# Altium PCB TX.PcbDoc
Units mm, origin at the board's own origin, x right, y up, seen from the top; angles counter-clockwise.
Board outline 28 x 47 mm, 2 copper layers (Top Layer, Bottom Layer); 23 components, 16 nets, 63 pads, 3 vias.
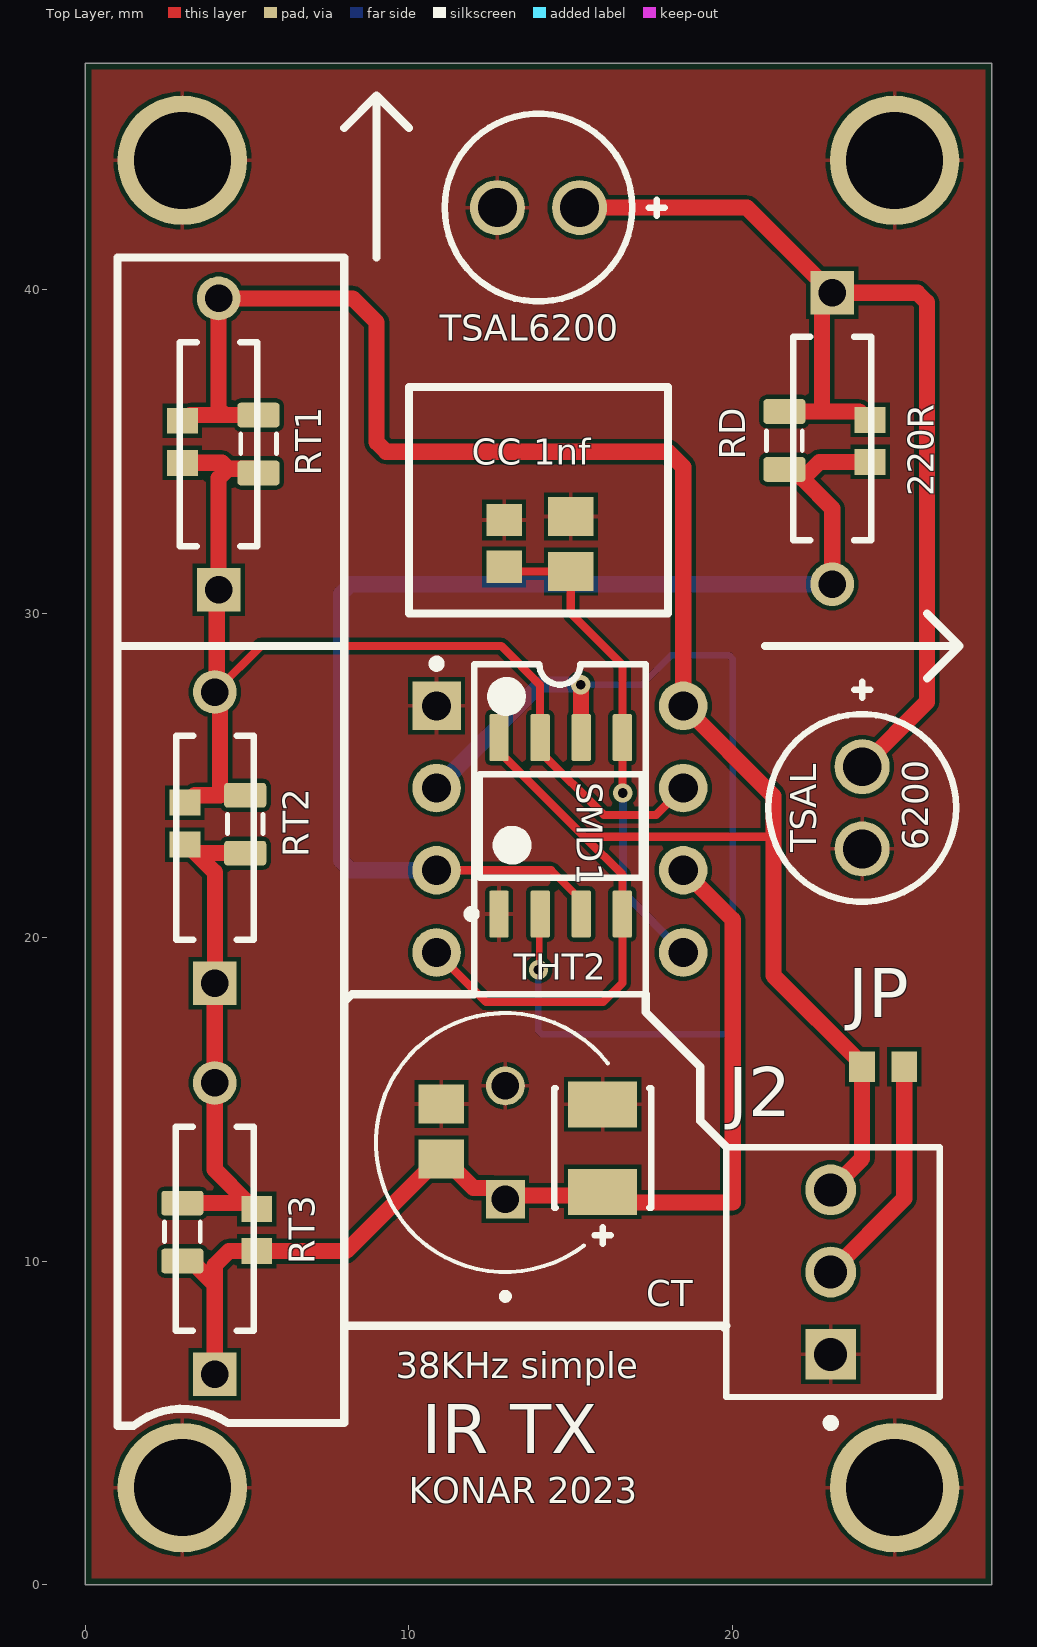
[diagram p0: Top Layer view]
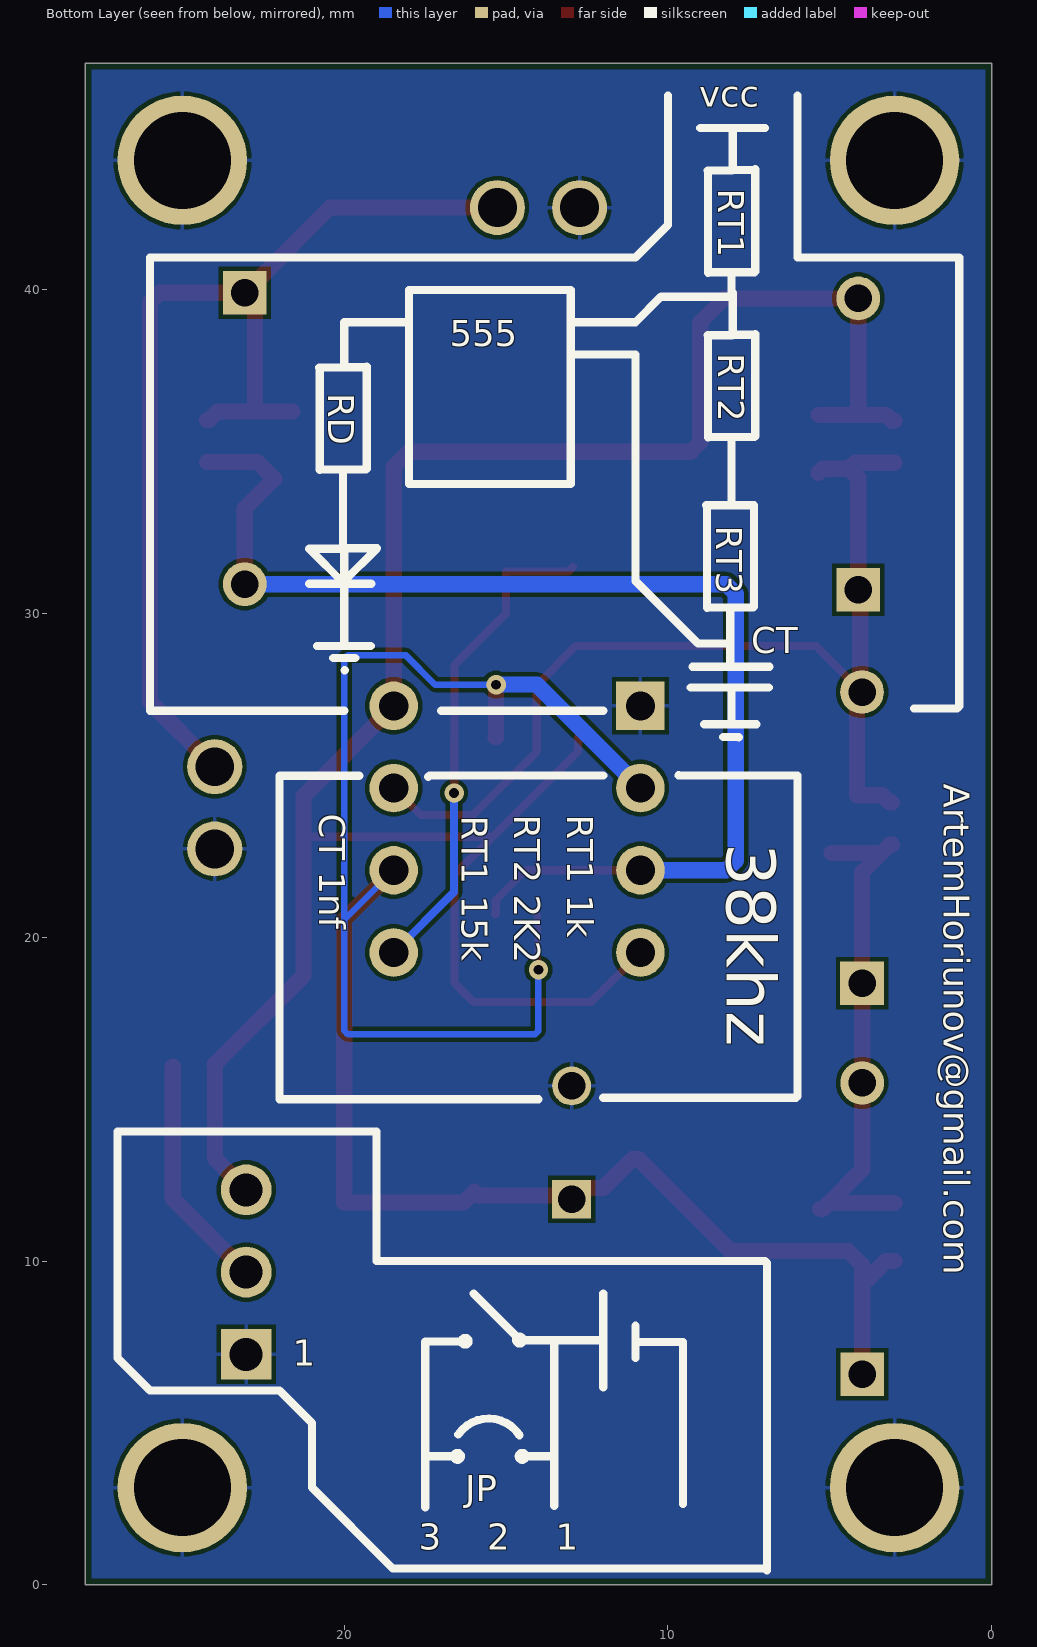
[diagram p1: Bottom Layer view, seen from below]
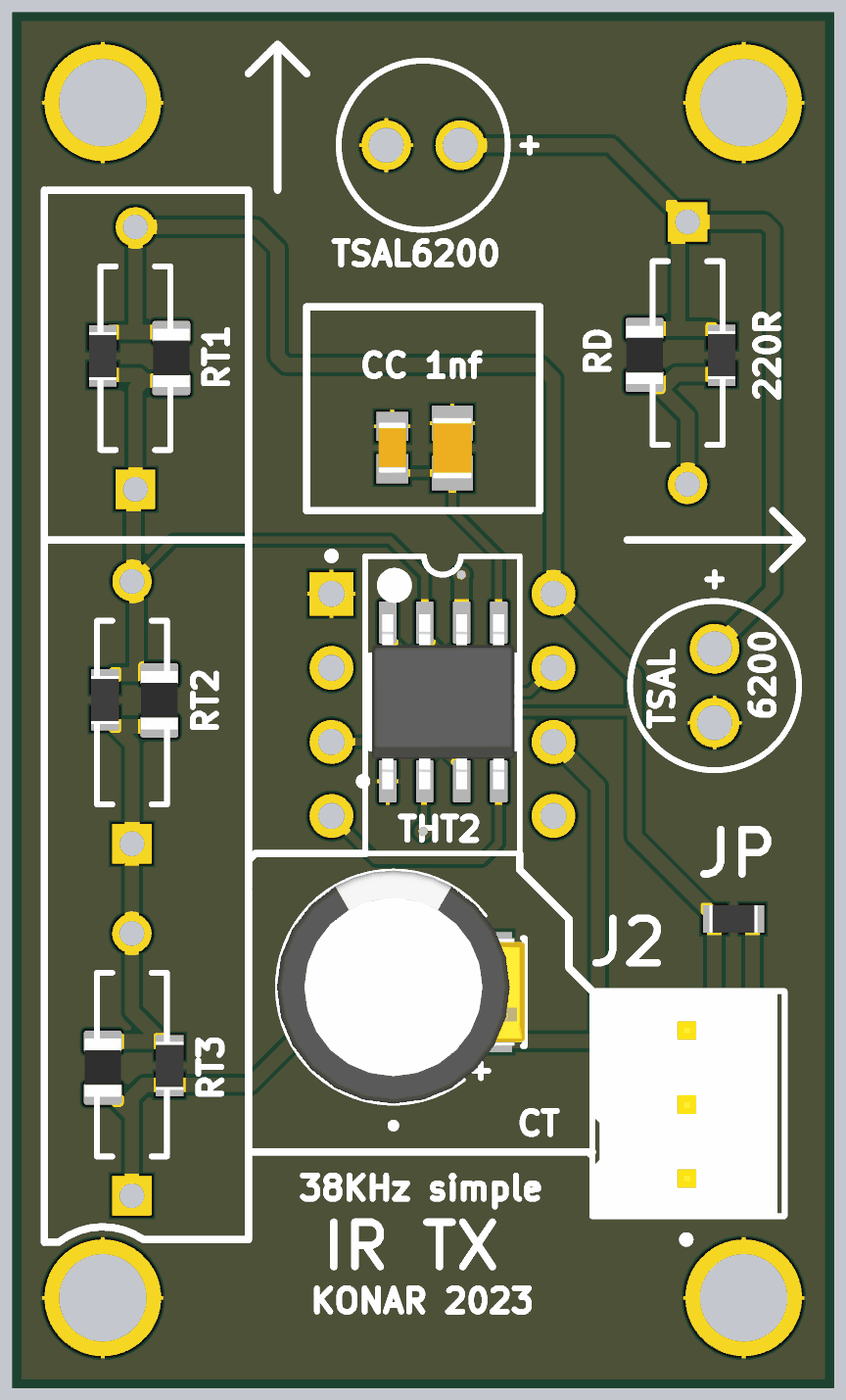
[diagram p2: 3D render of the assembled board from above, using the file's embedded part models]

## Layer stack, top to bottom
Top Solder: solder mask 0.0102, Solder Resist, Dk 3.5
Top Layer: signal copper 0.0356
Dielectric 1: dielectric 0.32, FR-4, Dk 4.8
Bottom Layer: signal copper 0.0356
Bottom Solder: solder mask 0.0102, Solder Resist, Dk 3.5

## Board outline
0,0 28,0 28,47 0,47

## Design rules (kind name [scope] priority, off if disabled: settings)
BoardOutlineClearance [All] p1: gap=0.2 ignorepadtopadclearanceinfootprint=FALSE
Clearance [All] p1: gap=0.127 ignorepadtopadclearanceinfootprint=FALSE except(0.25: Arc-Hole Track-Hole SMDPad-Hole THPad-Hole Via-Hole Fill-Hole Poly-Hole Region-Hole Text-Hole)
ComponentClearance [All] p1: gap=0.127 collisioncheckmode=3 verticalgap=0.127 showdistances=TRUE
DiffPairsRouting [All] p1: maxlimit=0.254 minlimit=0.127 mostfreqgap=0.127 toplayer_minwidth=0.127 toplayer_maxwidth=25.4 toplayer_prefwidth=0.127 bottomlayer_minwidth=0.127 bottomlayer_maxwidth=25.4 bottomlayer_prefwidth=0.127 maxuncoupledlength=12.7
Height [All] p1: minheight=0 maxheight=1816.048 prefheight=12.7
HoleSize [All] p1: absolutevalues=TRUE maxlimit=6.3 minlimit=0.3 maxpercent=80.000 minpercent=20.000
HoleToHoleClearance [All] p1: gap=0.25 allowstackedmicrovias=FALSE
MinimumAnnularRing [All] p1: minimumring=0.076
MinimumSolderMaskSliver [All] p1: minsoldermaskwidth=0
PlaneClearance [All] p1: clearance=0.127
PlaneConnect PlaneConnectPowerPads [InPadClass('PowerPads')] p1: planeconnectstyle=Direct reliefexpansion=0.508 reliefentries=4 reliefconductorwidth=0.254 reliefairgap=0.254
PlaneConnect [All] p2: pad.planeconnectstyle=Relief pad.reliefexpansion=0.3 pad.reliefentries=4 pad.reliefconductorwidth=0.127 pad.reliefairgap=0.127 via.planeconnectstyle=Direct via.reliefexpansion=0.3 via.reliefentries=4 via.reliefconductorwidth=0.127 via.reliefairgap=0.127
PolygonConnect PolygonConnectPowerPads [All vs (InPadClass('PowerPads'))] p1: connectstyle=Direct reliefconductorwidth=0.254 reliefentries=4 polygonreliefangle="90 Angle" airgapwidth=0.254
PolygonConnect [All] p2: thpad.connectstyle=Relief thpad.reliefconductorwidth=0.127 thpad.reliefentries=4 thpad.polygonreliefangle="90 Angle" thpad.airgapwidth=0.127 smdpad.connectstyle=Relief smdpad.reliefconductorwidth=0.127 smdpad.reliefentries=4 smdpad.polygonreliefangle="90 Angle" smdpad.airgapwidth=0.127 via.connectstyle=Direct via.reliefconductorwidth=0.127 via.reliefentries=4 via.polygonreliefangle="90 Angle" via.airgapwidth=0.127
RoutingVias [All] p1: holewidth=0.3 width=0.6 viastyle="Through Hole" minholewidth=0.3 minwidth=0.6 maxholewidth=0.6 maxwidth=6.6
SilkToSilkClearance [All] p1: silktosilkclearance=0
SilkToSolderMaskClearance [IsPad] p1: minsilkscreentomaskgap=0.127 clearancetoexposedcopper=TRUE
SolderMaskExpansion [All] p1: expansion=0.075 istentingtop=FALSE
Width [All] p1: maxlimit=25.4 minlimit=0.127 preferedwidth=0.127 minimp=50.000000 maximp=50.000000 favimp=50.000000
20 further rules are at their usual default settings.

## Classes and differential pairs
component class TX: J2 JP SMD1 THT2

## Components (designator, comment, footprint, x,y, rotation, side; value= is the part's Value field where it differs from the comment)
CC11 "Capacitor 1uF +/- 10% 16V 0603" CAPC1608X90X35ML15T15 12.938,32.167 r270 top value=0603
"CC 1nf" "Capacitor 1 uF +/- 10% 50 V 0805" CAPC2013X135X45NL10T25 15,32.15 r270 top value=0805 (schematic designator CC22)
CT "Electrolythic" CAPPRD350W60D800H1150 12.976,13.659 r90 top (schematic designator CT33)
CT11 "Capacitor 1 uF +/- 10% 50 V 0805" CAPC2013X135X45NL10T25 11,14 r270 top value=1µF
CT22 "Tantal" FP-T491B107K006AT-MFG 15.981,13.489 r270 top
J2 "22-11-2032" FP-22-11-2032-MFG 23.103,9.659 r90 top
JP "0603" RESC1609X50X30NL8T20 24.65,16 r180 top
RD "MFR-25FBF52-10K" RESA60-630X240 23.073,35.408 r270 top value=10k (schematic designator RD33)
RD11 "1KR5J" RESC0805(2012)_L 21.598,35.342 r270 top value=0805
RD22 "0603" RESC1609X50X30NL8T20 24.244,35.335 r270 top
RT1 "0603" RESC1609X50X30NL8T20 3,35.307 r90 top (schematic designator RT12)
RT2 "1KR5J" RESC0805(2012)_L 4.941,23.5 r90 top value=0805 (schematic designator RT23)
RT3 "1KR5J" RESC0805(2012)_L 3,10.9 r90 top value=0805 (schematic designator RT33)
RT11 "MFR-25FBF52-10K" RESA60-630X240 4.119,35.236 r90 top value=10k
RT13 "1KR5J" RESC0805(2012)_L 5.352,35.243 r90 top value=0805
RT21 "MFR-25FBF52-10K" RESA60-630X240 4.004,23.077 r90 top value=10k
RT22 "0603" RESC1609X50X30NL8T20 3.079,23.511 r90 top
RT31 "MFR-25FBF52-10K" RESA60-630X240 4,11 r90 top value=10k
RT32 "0603" RESC1609X50X30NL8T20 5.295,10.957 r90 top
SMD1 "NE555DR" D0008A_N 14.687,23.444 r90 top
THT2 "NE555P" P0008A 14.661,23.341 r0 top
TSAL "TSAL6200" VISH-TSAL6200 24,24 r270 top (schematic designator DS?)
TSAL6200 "TSAL6200" VISH-TSAL6200 14,42.54 r180 top (schematic designator DS?)

## Footprints (in the part's own frame and the unit in brackets; to place one, negate y for a bottom-side part, rotate by r counter-clockwise, add the part's x,y. Pads: shape width x height; smd on the part's side, far side on the other; paste and mask are expansions set on the pad)
CAPC1608X90X35ML15T15 [mm] "Chip Capacitor, 2-Leads, Body 1.75x0.95mm, IPC Low Density"
  rect 1x1.1 smd: 1(-0.725,0) 2(0.725,0)
  body extent -0.87,-0.48 0.87,0.48, height 0.9
CAPC2013X135X45NL10T25 [mm] "Chip Capacitor, 2-Leads, Body 2.10x1.35mm, IPC Medium Density"
  rect 1.2x1.4 smd: 1(-0.85,0) 2(0.85,0)
  body extent -1.05,-0.67 1.05,0.67, height 1.35
CAPPRD350W60D800H1150 [mm]
  round 1.2 hole 0.85: N(1.75,0)
  rect 1.2x1.2 hole 0.85: P(-1.75,0)
  silkscreen extent -4.85,-3.16 4,4, body extent -4,-4 4,4, height 11.5
D0008A_N [mm] "SOIC, 8-Leads, Body 5x4mm, Pitch 1.27mm, IPC Medium Density"
  rrect17% 1.45x0.6 smd: 1(-2.725,1.905) 2(-2.725,0.635) 3(-2.725,-0.635) 4(-2.725,-1.905) 5(2.725,-1.905) 6(2.725,-0.635) 7(2.725,0.635) 8(2.725,1.905)
  silkscreen extent -2.85,-2.5 1.6,2.88, body extent -3,-2.45 3,2.45, height 1.63
FP-22-11-2032-MFG [mm]
  rect 1.57x1.57 hole 1.02 paste-2539.97 mask+0: 1(-2.54,0.075)
  round 1.57 hole 1.02 paste-2539.97 mask+0: 2(0,0.075) 3(2.54,0.075)
  silkscreen extent -4.78,-3.3 3.86,3.3, body extent -3.96,-3.4 3.96,3.4, height 0.25
FP-T491B107K006AT-MFG [mm]
  rect 1.42x2.13 smd paste+0 mask+0: 1(-1.35,0) 2(1.35,0)
  silkscreen extent -1.85,-1.5 2.95,1.5, body extent -2.18,-1.62 2.18,1.62, height 0.25
P0008A [mm] "DIP, 8-Leads, Body 10.15x6.6mm, Pitch 2.54mm"
  rect 1.5x1.5 hole 0.9: 1(-3.81,3.81)
  round 1.5 hole 0.9: 2(-3.81,1.27) 3(-3.81,-1.27) 4(-3.81,-3.81) 5(3.81,-3.81) 6(3.81,-1.27) 7(3.81,1.27) 8(3.81,3.81)
  silkscreen extent -3.93,-5.1 2.65,5.23, body extent -3.95,-5.07 3.95,5.07, height 5.08
RESA60-630X240 [mm] "Axial Resistor, 2-Leads, Dia 2.4mm, Body Length 6.3mm"
  rect 1.35x1.35 hole 0.85: 1(-4.5,0)
  round 1.35 hole 0.85: 2(4.5,0)
  silkscreen extent -3.15,-1.2 3.15,1.2, body extent -4.77,-1.19 4.77,1.2, height 2.4
RESC0805(2012)_L [mm] "Chip Resistor, Body 2.0x1.3mm, IPC High Density"
  rrect25% 0.76x1.3 smd: 1(-0.9,0) 2(0.89,0)
  silkscreen extent -0.3,-0.55 0.3,0.55, body extent -1,-0.62 1,0.63, height 0.6
RESC1609X50X30NL8T20 [mm] "Chip Resistor, 2-Leads, Body 1.65x0.95mm, IPC Medium Density"
  rect 0.8x0.95 smd: 1(-0.65,0) 2(0.65,0)
  body extent -0.82,-0.48 0.82,0.48, height 0.5
VISH-TSAL6200 [mm] "THD, 2-Leads, Dia 5.8mm, Pitch 2.54mm"
  round 1.7 hole 1.2: 1(-1.27,0) 2(1.27,0)
  silkscreen extent -3.9,-2.9 2.9,2.9

## Part data
CC11: library part CMP-001-00004-6, "Chip Capacitor, 1 uF, +/- 10%, 16 V, 0603 (1608 Metric)", Capacitor Type=Ceramic, Case/Package=0603, Max Operating Temperature=125°C, Min Operating Temperature=-55°C, Tolerance=10%, Voltage rating=16V, Mounting Technology=SM, Pins=2, RoHS Compliant=True
"CC 1nf" CT11: library part CMP-001-00007-6, "Chip Capacitor, 1 uF, +/- 10%, 50 V, 0805 (2012 Metric)", Capacitor Type=Ceramic, Case/Package=0805, Max Operating Temperature=125°C, Min Operating Temperature=-55°C, Tolerance=10%, Voltage rating=50V, Mounting Technology=SM, Pins=2, RoHS Compliant=True
CT: library part EEUFR1V101, "Aluminium Electrolytic Capacitor, Fr Series, 100 - F, - 20%, 35 V, 8 Mm, Radial Leaded", Package="RADIAL-2 Panasonic", Availability="In Stock", Check_prices=https://www.snapeda.com/parts/EEUFR1V101/Panasonic/view-part/2780939/?ref=eda, MF=Panasonic, MP=EEUFR1V101, Price=None, SnapEDA_Link=https://www.snapeda.com/parts/EEUFR1V101/Panasonic/view-part/2780939/?ref=snap
CT22: library part CMP-03017-000031-1, "CAP TANT 100UF 10% 6.3V 1411", Capacitance=100uF, Case Code (Imperial)=1411, Case Code (Metric)=3528, Dielectric Material=Tantalum, ESR (Equivalent Series Resistance)=3R, Leakage Current=6.3uA, Max Operating Temperature=125°C, Min Operating Temperature=-55°C, Package Quantity=1, Tolerance=10%, Voltage=6.3V, Voltage Rating (DC)=6V, Case/Package=1411, Depth=2.8mm, Dissipation Factor=15%, Failure Rate=0.001%, Features="General Purpose", Height=1.9mm, Height - Seated (Max)=0.083inch, Lead Free="Lead Free", Length=3.5mm, Life (Hours)=2000Hour, Mount="Surface Mount", Number of Pins=2, Packaging="Tape and Reel", Polarity=Polar, Radiation Hardening=No, REACH SVHC="No SVHC", RoHS Compliant=Yes, Termination=SMD/SMT, Voltage rating=6.3V, Width=2.8mm
J2: library part CMP-04776-000113-1, "CONN HEADER VERT 3POS 2.54MM", Current rating=4A, Manufacturer=Molex, Temperature="-40°C to +80°C", Temperature Range High=+80°C, Temperature Range Low=-40°C, Voltage rating=500V, Automotive=No, Category=Conn, ComponentLink2Description=Datasheet, ComponentLink2URL=https://www.molex.com/webdocs/datasheets/pdf/en-us/0022112032_PCB_HEADERS.pdf, Conn Gender=Male, Conn Orientation=Vertical, Contact material=Gold,Nickel, Device Class L1=Connectors, Device Class L2="Headers and Wire Housings", Device Class L3=unset, Digikey Description="CONN HEADER VERT 3POS 2.54MM", Footprint Url=https://www.molex.com/pdm_docs/sd/022112032_sd.pdf, Height=10.91mm, Lead Free=Yes, Manufacturer Part Number=22-11-2032, Mounting Type="Through Hole", Mouser Description="KK® 254 Solid Header, Vertical, with Friction Lock, 3 Circuits, Gold (Au) Plating", Number of Contacts=3, Number of Rows=1, Octopart=https://octopart.com/22-11-2032-molex-10085, Package=22-11-2032, Pitch=2.54mm, RoHS=TRUE
JP RD22 RT1 RT22 RT32: library part CMP-2000-03816-5, "Chip Resistor, 0 Ohm, Jumper, 100 mW, -55 to 155 degC, 0603 (1608 Metric), RoHS, Tape and Reel", Manufacturer="Vishay Semiconductor", Max Operating Temperature="155 degC", Min Operating Temperature="-55 degC", Package Quantity=5000, Voltage rating="75 V", ComponentLink1Description="Manufacturer URL", ComponentLink1URL=http://www.vishay.com/, ComponentLink2Description=Datasheet, ComponentLink2URL=http://www.vishay.com/docs/20035/dcrcwe3.pdf, DatasheetVersion=06/2012, Height="0.45 mm", Length="1.55 mm", Mount="Surface Mount", Mounting Technology="Surface Mount", PackageDescription="2-Pin Surface Mount Device, Body 1.575 x 0.85 mm", PackageReference=0603, Packaging="Tape and Reel", Pins=2, REACH SVHC=Unknown, RoHSCompliant=true
RD RT11 RT21 RT31: library part CMP-009-00047-4, "Axial Resistor, 10 KOhm, +/- 1%, 0.25 W, -55 to 155 degC, 2-Pin THD, RoHS, Bulk", Case/Package=Axial, Manufacturer=Yageo, Max Operating Temperature=155°C, Min Operating Temperature=-55°C, Package Description="2-Pin Axial Lead, Dia 2.4 mm, Body Length 6.3 mm", Package Quantity=200, Package Reference=MFR-25, Power=250mW, Tolerance=1%, Voltage rating=250V, Datasheet URL=http://www.yageo.com/documents/recent/Yageo%20LR_MFR_2013.pdf, Datasheet Version=Apr-13, Manufacturer URL=http://www.yageo.com/, Mounting Technology=TH, Packaging=Bulk, RoHS Compliant=True
RD11 RT2 RT3 RT13: library part CMP-009-00076-2, "1K 0.125W 5% 0805 (2012 Metric)  SMD", Case/Package=0805, Power=125mW, Tolerance=5%, Mounting Technology=SMT, Pins=2
SMD1: library part CMP-016-00007-3, "Precision Timer, 4.5 to 16 V, 0 to 70 degC, 8-Pin SOIC (D), Green (RoHS & no Sb/Br), Tape and Reel", Case/Package=SOIC, Frequency=100kHz, Manufacturer="Texas Instruments", Max Operating Temperature=70°C, Max Ouput Current=-200mA, Max Supply Voltage=16V, Min Operating Temperature=0°C, Min Supply Voltage=4.5V, Package Description="8-Pin Small Outline Integrated Circuit, Body 4.9 x 3.9 mm, Pitch 1.27 mm", Package Quantity=2500, Package Reference=D0008A, Package Version="4040047-3/M, 06/2011", Datasheet URL=http://www.ti.com/general/docs/lit/getliterature.tsp?genericPartNumber=NE555&fileType=pdf, Datasheet Version="SLFS022I, 09/2014", Manufacturer URL=http://www.ti.com/, Mounting Technology=SM, Package URL=http://www.ti.com/lit/ml/msoi002j/msoi002j.pdf, Packaging=TapeandReel, Pins=8, RoHS Compliant=True
THT2: library part CMP-2000-04954-1, "Precision Timer, 4.5 to 16 V, 0 to 70 degC, 8-Pin DIP, Pb-Free, Tube", Manufacturer=TexasInstruments, Maximum High Level Output Current=-200mA, Maximum Low Level Output Current=200mA, Operating Supply Voltage=5, Package=8PDIP, Package Description="8-Pin Double In-line Package, Body 9.59 x 6.35 mm, Pitch 2.54 mm", Package Reference=P8, Category=Timer, Datasheet URL=http://www.ti.com/general/docs/lit/getliterature.tsp?genericPartNumber=NE555&fileType=pdf, Datasheet Version="Rev. I, 09/2014", Manufacturer URL=http://www.ti.com/, Number of Internal Timers=1, Package URL=http://www.ti.com/lit/ml/mpdi001b/mpdi001b.pdf, Packaging=Rail/Tube, Rad Hard=No, Type=Standard
TSAL TSAL6200: library part CMP-2000-07327-1, "High Power Infrared Emitting Diode, GaAlAs, MQW, 1.35 V, 100 mA, -40 to 85 degC, 2-Pin THD, RoHS, Bulk", Forward Current=100mA, Forward Voltage=3V, Manufacturer=Vishay, Operating Temp Range=-40Cto85C, Operating Temperature Classification=Industrial, Package Description="2-Pin Through Hole Device, Dia 5.8 mm, Pitch 2.54 mm", Package Type=T-13/4, Power Dissipation=160W, Reverse Voltage=5V, Chip Material=GaAlAs, Datasheet URL=http://www.vishay.com/docs/81010/tsal6200.pdf, Datasheet Version="Rev. 2.4, 03/2014", DELETED=Compliant, High Brightness=Yes, Lens Dimensions=5x5x7.7mm, Lens Type=Colored, Lum Intensity=500mW/srmcd, Luminous Intensity=500mW/sr, Main Category=IrLED, Manufacturer URL=http://www.vishay.com/, Mounting=ThroughHole, Mounting Technology=ThroughHole, Number of  Elements=1, Package Reference=TSAL6200, Packaging=Bulk, Peak Wavelength=950nm, Pin Count=2, Product Depth (mm)=5.8mm, Product Height (mm)=8.7mm, Product Length (mm)=5.8mm, Rad Hardened=No, Shape Type=Circular, Test Current (It)=100mA, Type=IrLED, Viewing Angle=34deg

## Free pads (board coordinates)
  round 4 hole 3: 2(3,3) 2(3,44) 2(25,3) 2(25,44)

## Via types
v1: diameter 0.6, hole 0.3, Top Layer to Bottom Layer, 3 vias

## Nets (pads, with @x,y where several pads share a name; then routed paths per layer and width w, separated by ;. In a path a pad name is that pad's centre, name@x,y a point inside that pad or via, vN(x,y) a via of type N, cw(c..) or ccw(c..) an arc to the next point about the centre after c; other vN are vias at no path point)
+5: J2.3 JP.2 RT1.2 RT11.2 RT13.2 SMD1.4 SMD1.8 THT2.4 THT2.8 | length 71.5
  Top Layer w0.254: THT2.4 12.382,18 16,18 16.592,18.592 SMD1.4 16.592,21.934 15.423,23.103 ; SMD1.8 12.782,25.744 15.423,23.103 ; 21.28,22.953 21.256,22.976 21.129,23.103 15.423,23.103
  Top Layer w0.5: RT1.2 3.075,35.957 3.251,36.133 4.302,36.133 ; RT13.2 4.302,36.133 ; J2.3 23.997,13.168 23.997,15.997 JP.2 24,16.075 21.256,18.819 21.256,22.976 21.256,24.366 THT2.8 18.471,34.529 18,35 9.293,35 9,35.293 9,39 8.264,39.736 RT11.2 4.119,36.316 4.302,36.133
GND: "CC 1nf.1" CC11.1 CT11.1 CT22.1 CT.N J2.1 pad.2 SMD1.1 THT2.1 TSAL6200.2 TSAL.2
NetCC1_2: 
NetCC11_2: "CC 1nf.2" CC11.2 SMD1.5 THT2.5 | length 15.3
  Top Layer w0.254: CC11.2 13.079,31.3 15,31.3 15,30 16.592,28.408 SMD1.5 16.599,26.161 16.599,24.466 v1(16.607,24.458)
  Bottom Layer w0.254: v1(16.607,24.458) 16.607,21.394 THT2.5
NetCT1_P: 
NetCT11_2: CT11.2 CT22.2 CT.P RT3.1 RT31.1 RT32.1 SMD1.2 SMD1.6 THT2.2 THT2.6 | length 69.6
  Top Layer w0.2: v1(14,19) 14.026,19.026 14.026,20.693 SMD1.2
  Top Layer w0.5: RT3.1 3.27,10 4,9.27 ; RT31.1 4,9.27 ; v1(15.309,27.805) 15.315,27.798 15.315,26.175 SMD1.6 ; THT2.6 20,20.542 20,11.803 16.317,11.803 CT22.2 15.866,12.024 13.091,12.024 CT.P 12.626,12.259 11.991,12.259 11.1,13.15 CT11.2 10.9,13.15 8.057,10.307 RT32.1 4.436,10.307 4,9.871 4,9.27
  Bottom Layer w0.2: v1(14,19) 14,17.117 14.117,17 19.883,17 20,17.117 20,20.542 ; v1(15.309,27.805) 17.194,27.805 18.106,28.717 19.883,28.717 20,28.6 20,20.542 ; THT2.6 20,20.542
  Bottom Layer w0.5: THT2.2 14.045,27.805 v1(15.309,27.805)
NetD?_1: 
NetD?_2: 
NetDS?_1: RD11.1 RD22.1 RD.1 TSAL6200.1 TSAL.1 | length 34.4
  Top Layer w0.5: TSAL6200.1 20.442,42.54 RD.1@22.738,40.243 ; RD11.1 22.755,36.242 ; RD.1@23.444,40.333 23.354,40.243 RD.1@22.738,40.243 ; TSAL.1 26,27.27 26,39.616 25.707,39.908 RD.1 ; RD22.1 24.169,35.985 23.911,36.242 22.755,36.242 ; RD.1@22.738,40.243 RD.1 ; 22.755,36.242 22.755,39.59 RD.1
NetJ2_2: J2.2 JP.1 | length 7.3
  Top Layer w0.5: J2.2 25.3,11.931 JP.1
NetRbyp_1: 
NetRbyp_2: 
NetRD11_2: RD11.2 RD22.2 RD.2 SMD1.3 THT2.3 | length 37.8
  Top Layer w0.254: THT2.3 14.395,22.071 15.322,21.144 SMD1.3 SMD1.3@15.337,20.704
  Top Layer w0.5: RD.2 23.073,33.247 22.16,34.16 22.685,34.685 RD22.2
  Bottom Layer w0.5: THT2.3 8.201,22.071 7.908,22.364 7.908,30.616 8.201,30.908 RD.2
NetRsen1_1: 
NetRT11_1: RT1.1 RT2.2 RT11.1 RT13.1 RT21.2 RT22.2 SMD1.7 THT2.7 | length 32.7
  Top Layer w0.254: RT21.2 4.062,27.635 5.427,29 12.851,29 14.052,27.8 SMD1.7 14.052,25.744 16.019,23.777 17.637,23.777 THT2.7
  Top Layer w0.5: RT1.1 4.225,34.657 4.409,34.473 ; RT22.2 3.154,24.161 3.382,24.39 4.162,24.39 4.162,27.419 RT21.2 ; RT21.2@4.062,27.635 4.062,30.678 RT11.1 4.119,34.184 4.409,34.473 ; RT13.1 5.222,34.473 4.409,34.473
NetRT21_1: RT2.1 RT3.2 RT21.1 RT22.1 RT31.2 RT32.2 | length 15.8
  Top Layer w0.5: RT3.2 RT32.2@5.037,11.79 ; RT22.1 3.154,22.861 RT22.1@3.415,22.6 ; RT2.1 RT22.1@3.415,22.6 ; RT32.2 5.22,11.607 RT32.2@5.037,11.79 ; RT22.1@3.415,22.6 4.004,22.01 RT21.1 4,18.573 RT31.2 4,12.827 RT32.2@5.037,11.79

## Polygon pours and split planes (outlines as drawn)
GND on Top Layer "GND_L01_P001" (solid, pour order 1): 0,47 0,0 28,0 28,47
GND on Bottom Layer "GND_L02_P002" (solid, pour order 2): 28,47 0,47 0,0 28,0

## Silkscreen, mask and mechanical layers (free items; w line width, h text height)
Top Overlay:
  lines w0.254: 1,4.904 1,29 ; 1.008,4.912 1.491,4.912 cw(c3,3) 4.38,5.008 ; 4.419,5 8,5 ; 8,8 19.808,8 19.738,7.93 ; 8,18 8.241,18.241 12.011,18.241 ; 8,45 9,46 ; 9,41 9,46 ; 10,45 9,46 ; 17.311,18.241 17.311,17.689 19,16 19,14.322 19.803,13.519 ; 21,29 27,29 ; 26,28 27,29 ; 26,30 27,29 ; 1,29 1,41 8,41 8,29 ; 1,29 8,29 ; 8,5 8,17 ; 8,5 8,29 ; 8,17 8,17 ; 10,30 18,30 18,36 18,37 10,37 10,30
  text "220R" at 26.203,33.624 h0.8 r90
  text "6200" at 26.042,22.685 h0.8 r90
  text "38KHz simple" at 9.585,6.381 h0.8
  text "IR TX" at 10.4,4.058 h1.52
  text "KONAR 2023" at 9.994,2.513 h0.8
Bottom Overlay:
  circle w0.254: c16.265,7.522 r0.103
  circle w0.254: c14.583,7.555 r0.103
  circle w0.254: c16.503,3.966 r0.103
  circle w0.254: c14.503,3.966 r0.103
  lines w0.254: 2.399,27.071 1.071,27.071 1,27.143 1,41 2,41 6,41 6,46 ; 6.862,28.358 9.243,28.358 ; 6.889,27.716 9.296,27.716 ; 7,45 9,45 ; 7.263,26.579 8.882,26.579 ; 7.812,26.178 7.825,26.192 8.293,26.192 ; 8,39.912 8,38.619 8.02,38.599 8.771,38.599 8.759,38.587 8.759,35.441 8.747,35.453 7.329,35.453 7.305,35.477 7.305,38.634 7.329,38.611 8.02,38.611 ; 8,45 8,43.707 8.02,43.687 8.771,43.687 8.759,43.675 8.759,40.529 8.747,40.541 7.329,40.541 7.305,40.565 7.305,43.723 7.329,43.699 8.02,43.699 ; 8.038,34.65 8.038,33.357 8.047,33.348 8.82,33.348 8.797,33.325 8.797,30.179 8.785,30.191 7.367,30.191 7.343,30.215 7.343,33.349 7.367,33.349 8.058,33.349 ; 8.038,34.702 8.038,35.453 ; 8.038,40.541 8.038,39.79 10.21,39.79 11,39 13,39 ; 8.039,26.673 8.039,27.649 ; 8.076,30.191 8.076,29.44 8.076,28.381 8.076,29.076 9.076,29.076 9.816,29.816 ; 9.533,2.494 9.533,7.5 9.543,7.5 11,7.5 ; 9.672,25.006 9.666,25 6,25 6,15.089 6.044,15.044 12,15.044 ; 10,46 10,42 11,41 26,41 26,27 20,27 ; 11,7 11,8 ; 12,6.103 12,9 ; 12,7.551 13.47,7.551 13.514,7.507 13.514,2.437 ; 12,25 17.365,25 17.405,24.96 ; 12,27 17,27 ; 13,38 11,38 11,31 9.816,29.816 ; 13.472,7.55 14.55,7.55 16,9 ; 13.514,3.966 14.503,3.966 ; 14,15 22,15 22,24.981 21.99,24.99 19.538,24.99 ; 14.587,4.619 cw(c15.54,4.002) 16.476,4.642 ; 16.322,7.51 17.491,7.51 17.495,7.506 17.495,2.393 ; 16.48,3.966 17.468,3.966 17.499,3.936 ; 18,39 20,39 20,38 ; 19.662,28.627 20.341,28.627 ; 20,29 19.181,29 ; 20,29.01 20,31.996 20.038,32.034 20.038,33.702 20.038,34.453 ; 20,38.912 20,37.619 20.02,37.599 20.771,37.599 20.759,37.587 20.759,34.441 20.747,34.453 19.329,34.453 19.305,34.477 19.305,37.634 19.329,37.611 20.02,37.611 ; 20.019,31.995 19.999,32.015 18.985,32.015 20,31 20,30.921 ; 20.09,31.998 20.097,32.005 21.084,32.005 20,30.921 ; 20.838,29 19.181,29 ; 21.083,30.921 19.168,30.921 20,30.921 ; 9.816,29.816 9.816,29.816 ; 13,39 13,40 18,40 18,34 13,34 13,39 ; 19.181,29 19.181,29 ; 6.937,0.436 7.002,0.502 18.502,0.502 21,3 21,5 22,6 26,6 27,7 27,14 19,14 19,10 7,10 6.937,9.937 6.937,0.436 ; 19.985,28.246 19.993,28.246 19.985,28.246
  text "vcc" at 9.031,45.652 h0.8
  text "RT1" at 8.448,43.129 h0.8 r90
  text "555" at 16.746,38.254 h0.8
  text "RT2" at 8.448,38.045 h0.8 r90
  text "RD" at 20.49,36.802 h0.8 r90
  text "RT3" at 8.504,32.71 h0.8 r90
  text "CT" at 7.419,28.775 h0.8
  text "ArtemHoriunov@gmail.com" at 1.479,24.746 h0.8 r90
  text "CT 1nf" at 20.777,23.815 h0.8 r90
  text "RT1 1k" at 13.109,23.783 h0.8 r90
  text "RT2 2K2" at 14.741,23.783 h0.8 r90
  text "RT1 15k" at 16.372,23.75 h0.8 r90
  text "38khz" at 8.182,22.902 h1.52 r90
  text "1" at 21.589,6.763 h0.8
  text "JP" at 16.262,2.571 h0.8
  text "3    2    1" at 17.703,1.078 h0.8
BOARD_OUTLINE:
  the board outline again, w0.2